# Altium PCB PCB1.PcbDoc
Units mil, origin at the board's own origin, x right, y up, seen from the top; angles counter-clockwise.
Board outline 1181.1 x 472.44 mil, 2 copper layers (Top Layer, Bottom Layer), stack 61.855 mil thick; 29 components, 33 nets, 137 pads, 59 vias.
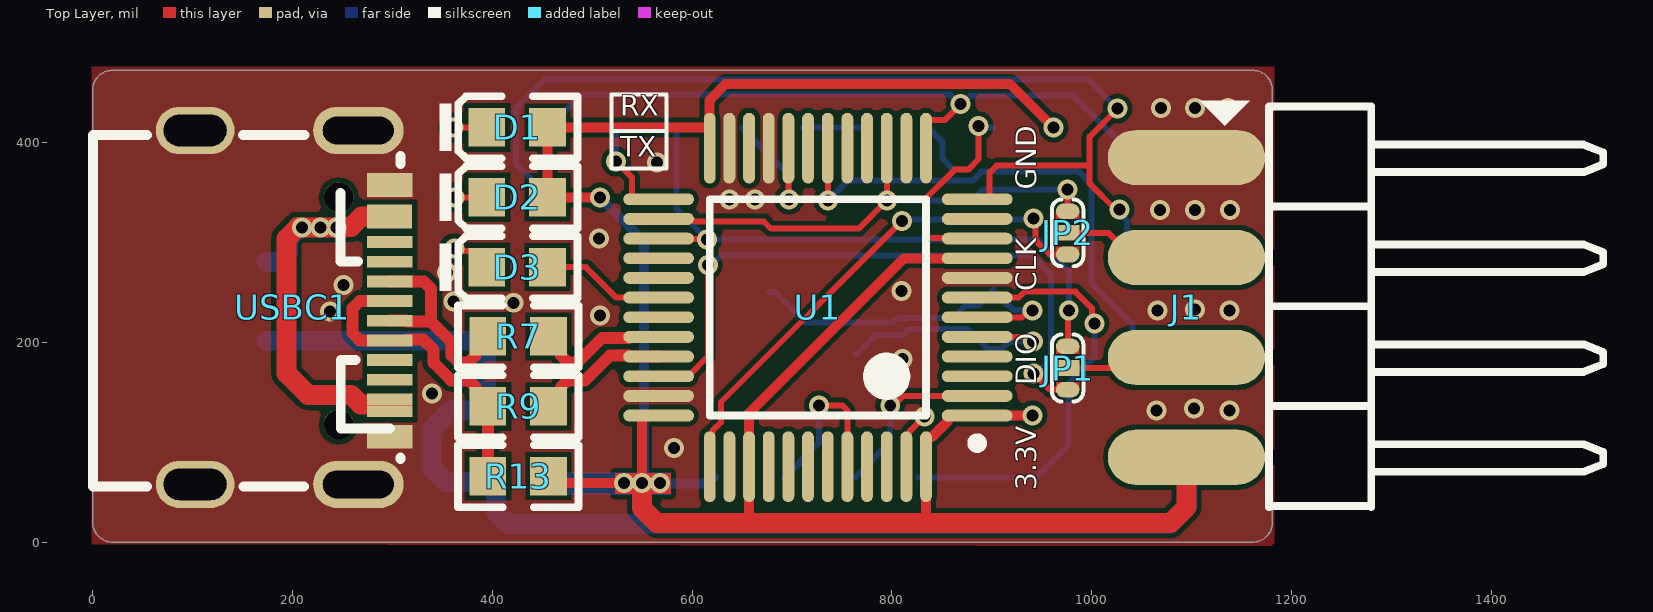
[diagram p0: Top Layer view]
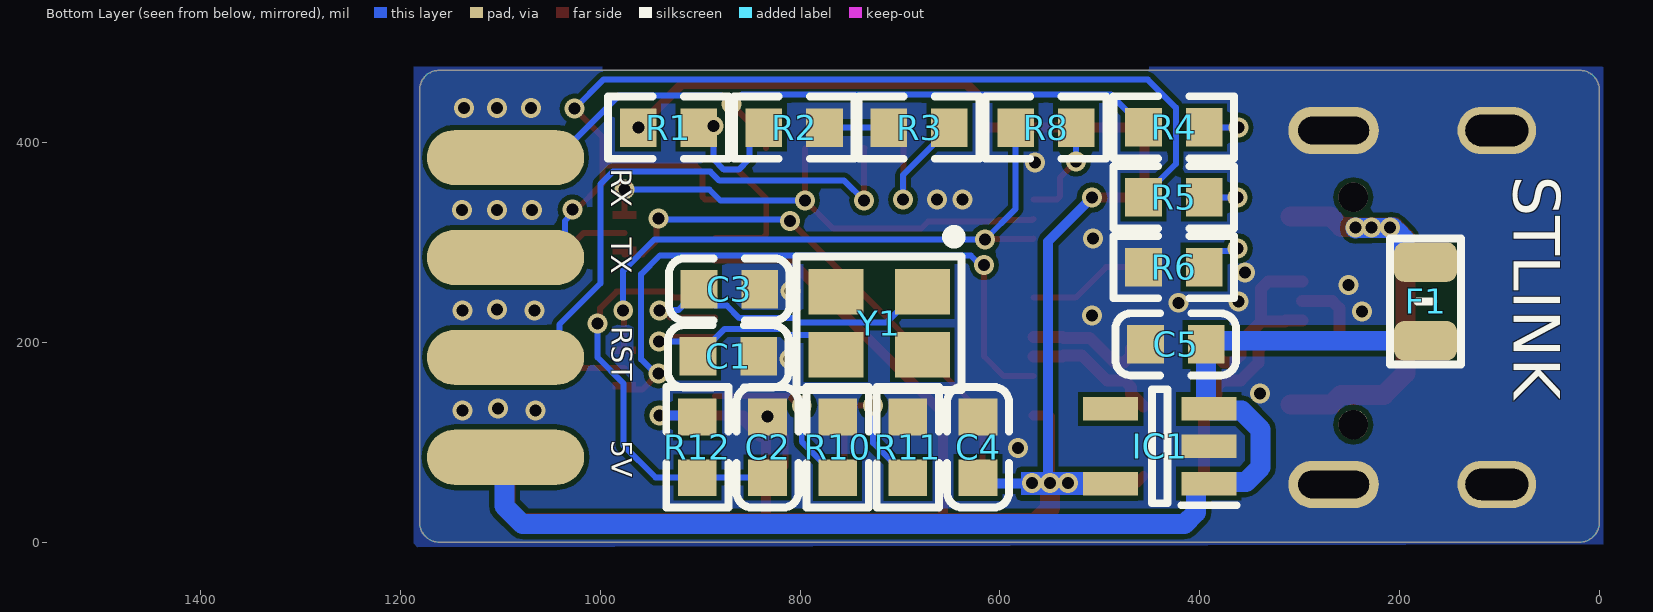
[diagram p1: Bottom Layer view, seen from below]

## Layer stack, top to bottom
Top Solder: solder mask 0.8, Solder Resist, Dk 3.8
Top Layer: signal copper 1.4
Dielectric 1: dielectric 59.055, FR-4, Dk 4.6
Bottom Layer: signal copper 1.4
Bottom Solder: solder mask 0.8, Solder Resist, Dk 3.8

## Board outline
0,19.68 0,452.76 cw(c19.68,452.76) 19.68,472.44 1161.42,472.44 cw(c1161.42,452.76) 1181.1,452.76 1181.1,19.69 cw(c1161.42,19.69) 1161.42,0 19.69,0 cw(c19.69,19.68)

## Design rules (kind name [scope] priority, off if disabled: settings)
Clearance [All] p1: gap=5 ignorepadtopadclearanceinfootprint=TRUE except(0: Arc-Hole Track-Hole SMDPad-Hole THPad-Hole Via-Hole Fill-Hole Poly-Hole Region-Hole Text-Hole)
DiffPairsRouting [All] p1: maxlimit=6 minlimit=6 mostfreqgap=6 toplayer_minwidth=12 toplayer_maxwidth=12 toplayer_prefwidth=12 bottomlayer_minwidth=12 bottomlayer_maxwidth=12 bottomlayer_prefwidth=12 maxuncoupledlength=500
HoleSize [All] p1: absolutevalues=TRUE maxlimit=248.03 minlimit=11.81 maxpercent=80.000 minpercent=20.000
MinimumSolderMaskSliver [All] p1: minsoldermaskwidth=3
PlaneClearance [All] p1: clearance=10
PlaneConnect [All] p1: planeconnectstyle=Direct reliefexpansion=20 reliefentries=4 reliefconductorwidth=10 reliefairgap=10
PolygonConnect [All] p1: connectstyle=Direct reliefconductorwidth=10 reliefentries=4 polygonreliefangle="90 Angle" airgapwidth=10
RoutingVias [All] p1: holewidth=12 width=20 viastyle="Through Hole" minholewidth=12 minwidth=20 maxholewidth=28 maxwidth=50
SilkToSilkClearance [All] p1: silktosilkclearance=0
SilkToSolderMaskClearance [IsPad] p1: minsilkscreentomaskgap=0 clearancetoexposedcopper=TRUE
SolderMaskExpansion [All] p1: expansion=1.5 istentingtop=FALSE
Width PWR [InNetClass('PWR')] p1: maxlimit=500 minlimit=10 preferedwidth=20 minimp=50.000000 maximp=50.000000 favimp=50.000000
Width [All] p2: maxlimit=50 minlimit=5 preferedwidth=6 minimp=50.000000 maximp=50.000000 favimp=50.000000
23 further rules are at their usual default settings.

## Classes and differential pairs
net class PWR: +3.3 +5 PWR
differential pair USB_1: +NetR7_2 -NetR9_2
differential pair USB_2: +USB_P -USB_N

## Components (designator, comment, footprint, x,y, rotation, side; value= is the part's Value field where it differs from the comment)
C1 "2.7pF" 0603_C 872,186 r0 bottom
C2 "0.1uF" 0603_C 832.75,95 r270 bottom
C3 "2.7pF" 0603_C 871,253 r0 bottom
C4 "1uF" 0603_C 622,95 r270 bottom
C5 "1uF" 0603_C 424,198 r180 bottom
D1 "" 0603_LED_S1 425,415.29 r0 top
D2 "" 0603_LED_S1 425,345.29 r0 top
D3 "" 0603_LED_S1 425,275.29 r0 top
F1 "1A" F0805 174,241 r270 bottom value=FUSE500mA
IC1 "ME6211C33M5G-N" SOT95P270X145-5N 440,96 r0 bottom
J1 "HDRSE_M_2X4" HDRSE_M_2X4 1095,235 r270 top locked value=HDRM_2X4
JP1 "JUMPER_SOLDER_3P" JP_3_60W 976,174.35 r90 top value=JMPHDR3PIN
JP2 "JUMPER_SOLDER_3P" JP_3_60W 976,309.65 r90 top value=JMPHDR3PIN
R1 "10KΩ" 0603_R 932,415 r180 bottom
R2 "10KΩ" 0603_R 806,415 r180 bottom
R3 "10KΩ" 0603_R 681,415 r0 bottom
R4 "680Ω" 0603_R 426,415.29 r180 bottom
R5 "680Ω" 0603_R 426,345.29 r180 bottom
R6 "2KΩ" 0603_R 426,275.29 r180 bottom
R7 "22Ω" 0603_R 426,206 r0 top
R8 "100Ω" 0603_R 554,415 r0 bottom
R9 "22Ω" 0603_R 426,136 r0 top
R10 "10KΩ" 0603_R 762.5,95 r270 bottom
R11 "10KΩ" 0603_R 692.25,95 r90 bottom
R12 "10KΩ" 0603_R 903,95 r90 bottom
R13 "1.5KΩ" 0603_R 426,66 r0 top
U1 "STM32F103CBT6" STM-LQFP48_N 726,235 r180 top
USBC1 "USB2.0 Type-C 16Pin母座" USB-C-SMD_TYPE-C-USB-5 200,235 r270 top locked
Y1 "8MHz" SMD-3225_4P 720.97,219.14 r0 bottom

## Footprints (in the part's own frame and the unit in brackets; to place one, negate y for a bottom-side part, rotate by r counter-clockwise, add the part's x,y. Pads: shape width x height; smd on the part's side, far side on the other; paste and mask are expansions set on the pad)
0603_C [mm]
  rect 0.93x0.98 smd: 1(-0.77,0) 2(0.77,0)
  silkscreen extent -1.53,-0.79 1.54,0.79, body extent -0.8,-0.4 0.8,0.4, height 0.3
0603_LED_S1 [mm]
  rect 0.93x0.98 smd: A(0.77,0) K(-0.77,0)
  silkscreen extent -1.98,-0.79 1.54,0.79, body extent -0.8,-0.4 0.8,0.4, height 0.6
0603_R [mm]
  rect 0.93x0.98 smd: 1(-0.77,0) 2(0.77,0)
  silkscreen extent -1.53,-0.79 1.54,0.79, body extent -0.85,-0.4 0.85,0.4, height 0.56
F0805 [mm] "FUSE FAST 500mA, 0805, 2012, 2.0X1.3mm"
  rrect50% 1x1.6 smd paste-0.1 mask+0.075: 1(-1,0) 2(1,0)
  Top Layer pour cut-out: -0.5,0.8 0.5,0.8 0.5,-0.8 -0.5,-0.8
  silkscreen extent -1.6,-0.9 1.6,0.9, body extent -1.1,-0.75 1.1,0.75, height 1.24
HDRSE_M_2X4 [mm] "Male Header 2X04 with 2.54 mm Pitch"
  oval 1.4x4 smd mask+0.1: 1(-3.81,0) 3(-1.27,0) 5(1.27,0) 7(3.81,0)
  oval 1.4x4 smd far side mask+0.1: 2(-3.81,0) 4(-1.27,0) 6(1.27,0) 8(3.81,0)
  silkscreen extent -5.25,0.34 5.08,10.6, body extent -5.01,-1 5.1,10.54, height 1.27
JP_3_60W [mm] "JUMPER SOLDER 0.6X1.6mm"
  oval 0.4x0.6 smd mask+0.05: 1(-0.55,0) 3(0.55,0)
  rect 0.4x0.6 smd mask+0.05: 2(0,0)
  Top Layer region: 0.55,0.294 0.35,0.294 0.35,-0.306 0.55,-0.306
  Top Layer region: -0.55,-0.306 -0.35,-0.306 -0.35,0.294 -0.55,0.294
  silkscreen extent -0.85,-0.4 0.85,0.4
SMD-3225_4P [mm]
  rect 1.4x1.15 smd: 1(-1.1,-0.8) 2(1.1,-0.8) 3(1.1,0.8) 4(-1.1,0.8)
  silkscreen extent -2.1,-2.35 2.1,1.7, body extent -1.6,-1.25 1.6,1.25, height 0.61
SOT95P270X145-5N [mm]
  rect 1.4x0.6 smd: 1(-1.25,0.95) 2(-1.25,0) 3(-1.25,-0.95) 4(1.25,-0.95) 5(1.25,0.95)
  silkscreen extent -1.95,-1.45 0.2,1.5, body extent -1.35,-1.45 1.35,1.45, height 1.45
STM-LQFP48_N [mm] "QFP, 48-Leads, Body 7x7mm, Pitch 0.5mm, IPC Medium Density"
  oval 1.8x0.3 smd: 1(-4.05,2.75) 2(-4.05,2.25) 3(-4.05,1.75) 4(-4.05,1.25) 5(-4.05,0.75) 6(-4.05,0.25) 7(-4.05,-0.25) 8(-4.05,-0.75) 9(-4.05,-1.25) 10(-4.05,-1.75) 11(-4.05,-2.25) 12(-4.05,-2.75) 25(4.05,-2.75) 26(4.05,-2.25) 27(4.05,-1.75) 28(4.05,-1.25) 29(4.05,-0.75) 30(4.05,-0.25) 31(4.05,0.25) 32(4.05,0.75) 33(4.05,1.25) 34(4.05,1.75) 35(4.05,2.25) 36(4.05,2.75)
  oval 0.3x1.8 smd: 13(-2.75,-4.05) 14(-2.25,-4.05) 15(-1.75,-4.05) 16(-1.25,-4.05) 17(-0.75,-4.05) 18(-0.25,-4.05) 19(0.25,-4.05) 20(0.75,-4.05) 21(1.25,-4.05) 22(1.75,-4.05) 23(2.25,-4.05) 24(2.75,-4.05) 37(2.75,4.05) 38(2.25,4.05) 39(1.75,4.05) 40(1.25,4.05) 41(0.75,4.05) 42(0.25,4.05) 43(-0.25,4.05) 44(-0.75,4.05) 45(-1.25,4.05) 46(-1.75,4.05) 47(-2.25,4.05) 48(-2.75,4.05)
  silkscreen extent -4.18,-2.75 2.75,3.57, body extent -3.5,-3.5 3.5,3.5, height 1.6
USB-C-SMD_TYPE-C-USB-5 [mm]
  oval 1.2x2.3 hole 0.7 slot 1.8 at 90 deg: 0(-4.5,1.675) 0(4.5,1.675)
  oval 1.2x2 hole 0.8 slot 1.6 at 90 deg: 0(-4.5,-2.475) 0(4.5,-2.475)
  rect 0.3x1.15 smd: A1(-3.263,2.473) A4(-2.462,2.471) A5(-1.162,2.475) A6(-0.162,2.475) A7(0.337,2.473) A9(2.638,2.475) A12(3.438,2.475) B1(3.138,2.475) B4(2.337,2.475) B5(1.838,2.475) B6(0.838,2.475) B7(-0.663,2.473) B9(-2.162,2.471) B12(-2.963,2.473)
  rect 0.3x1.148 smd: A8(-1.663,2.475) B8(1.337,2.475)
  round 0.75 hole 0.75 unplated: ""(-2.803,1.175) ""(2.978,1.175)
  silkscreen extent -4.38,-5.08 4.56,2.75, body extent -4.34,-5.14 4.6,2.76, height 3.25

## Part data
C1 C3: library part CMP-002-000144-1, "贴片电容", Package=0603, SuppliersPartNumber=C16149, ComponentLink1Description=供应商链接, ComponentLink1URL=http://www.szlcsc.com/product/details_16831.html, Design Item ID="0603 2.7pF (2R7) 0.25pF 50V", Source=Cap.SchLib
C2 C4 C5: library part CMP-002-000018-1, "贴片电容", Package=0603, SuppliersPartNumber=C15849, ComponentLink1Description=供应商链接, ComponentLink1URL=http://www.szlcsc.com/product/details_16531.html, Design Item ID="0603 1uF (105) 10% 50V", Source=Cap.SchLib
D1 D2 D3: library part CMP-012-000003-2, "发光二极管", Package=0603, SuppliersPartNumber=C72041, ComponentLink1Description=供应商链接, ComponentLink1URL=http://www.szlcsc.com/product/details_73150.html, Design Item ID="0603 蓝灯", Source=LED.SchLib
F1: library part CMP-001-000024-1, Design Item ID=FUSE_500mA_0805_FAST, MANF=MANF, MANF_P#=MANF_PART#, PARAM="500mA; 32VDC; fast acting", PARAM2="0.25 Ohm DC Cold Resistance", Source=protect_tvs_esd_fuse.SchLib
IC1: library part CMP-001-0849-1, "Integrated Circuit", Manufacturer_Name=Microne, Datasheet Link=https://datasheet.lcsc.com/szlcsc/1811131510_MICRONE-Nanjing-Micro-One-Elec-ME6211C33M5G-N_C82942.pdf, Design Item ID=ME6211C33M5G-N, Height=1.45mm, Manufacturer_Part_Number=ME6211C33M5G-N, Source=SamacSys.SchLib
J1: library part CMP-002-00326-1, "CONN, HEADER, Male, pitch: 2.54mm, 8POS", Design Item ID=HDRSE_M_2X4, MANF=MANF, MANF_P#=MANF_PART#, Source=conn_header_2.54_st_smd_edge.SchLib
JP1 JP2: library part CMP-001-0854-1, "JUMPER, HEADER 3PIN", Design Item ID=JUMPER_SOLDER_3P, MANF=MANF, MANF_P#=MANF_P#, Source=test-tp_jumper.SchLib
R1 R2 R3 R4 R5 R6 R7 R8 R9 R10 R11 R12 R13: library part CMP-004-000401-1, "贴片电阻", Package=0603, SuppliersPartNumber=C25804, ComponentLink1Description=供应商链接, ComponentLink1URL=http://www.szlcsc.com/product/details_26547.html, Design Item ID="0603 10KΩ (1002) 1%", Source=RES.SchLib
U1: library part CMP-001-0295-1, "ARM Cortex-M3 32-bit MCU, 128 KB Flash, 20 KB Internal RAM, 37 I/Os, 48-pin LQFP, -40 to 85 degC, Tray", I/Os (High Current)=37, Operating Frequency(F) (Processor speed) (MHz)=72Hz, Supply Voltage(Vcc) min (V)=2, A/D Converter="2x12-bit (10 Channel)", Component Type=Standard, ComponentLink1Description="Manufacturer URL", ComponentLink1URL=http://www.st.com/web/en/home.html, ComponentLink2Description=Datasheet, ComponentLink2URL=http://www.st.com/st-web-ui/static/active/en/resource/technical/document/datasheet/CD00161566.pdf, ComponentLink3Description="Package Specification", ComponentLink3URL=http://www.st.com/st-web-ui/static/active/en/resource/technical/document/datasheet/DM00058181.pdf, Core="ARM Cortex-M3", DatasheetVersion="Rev. 16", Design Item ID=STM32F103CBT6, FLASH Size (Prog) (kB)=128, Internal RAM Size (kB)=20, Mounting Technology="Surface Mount", PackageDescription="48-Pin Low Profile Quad Flat Package, 7 x 7 mm Body, 0.5 mm Pitch", PackageReference=LQFP48, PackageVersion="Rev. 6, 06/2013", Packing=Tray, PartNumber=STM32F103CBT6, Pin Count=48, Source="STMicroelectronics STM32 F1.SchLib"
USBC1: library part CMP-00155-3, "USB2.0 Type-C 母座 16Pin", Author=白一清, Part Number="USB2.0 Type-C 16Pin母座"
Y1: library part CMP-016-000002-1, "贴片晶振", Package=SMD-3225_4P, SuppliersPartNumber=C9002, ComponentLink1Description=供应商链接, ComponentLink1URL=http://www.szlcsc.com/product/details_9522.html, Design Item ID="SMD-3225_4P  12MHZ 20PF 10PPM", Source=CrystalOscillator.SchLib

## Via types
v1: diameter 20, hole 12, Top Layer to Bottom Layer, tented both sides, 59 vias

## Nets (pads, with @x,y where several pads share a name; then routed paths per layer and width w, separated by ;. In a path a pad name is that pad's centre, name@x,y a point inside that pad or via, vN(x,y) a via of type N, cw(c..) or ccw(c..) an arc to the next point about the centre after c; other vN are vias at no path point)
+3.3: C4.2 D1.A D2.A IC1.5 J1.7 R1.1 R12.2 R13.2 U1.1 U1.9 U1.24 U1.36 U1.39 U1.48 | length 2566.6
  Top Layer w10: R13.2 463.32,59 v1(532,59) ; v1(508,345) 455.6,345 D2.A D1.A 616.9,415.29 U1.24@616.9,423.63 ; v1(550,59) 550,125.9 550.84,126.73 U1.36 ; U1.24@617.27,424.01 617.39,424.12 617.39,425.6 617.27,425.72 617.27,442.27 633.57,458.57 918.43,458.57 v1(962,415) ; 655,19 657.1,21.1 U1.39 657.1,129.1 812.21,284.21 U1.9 ; 832,19 834.27,21.27 U1.48 834.27,104.59 835.1,105.43 840.49,105.43 855.57,120.51 855.57,125.9 856.41,126.73 U1.1 885.58,126.87 940.87,126.87 v1(941,127) ; 932,19 935,22 ; 979.32,21.68 982,19
  Top Layer w20: v1(550,59) 550,34 565,19 655,19 832,19 932,19 982,19 1079,19 1095,35 J1.7
  Bottom Layer w10: IC1.5 489.41,58.8 531.8,58.8 v1(532,59) ; v1(508,345) 552,301 552,65 558,59 v1(568,59) 568.5,58.5 615.81,58.5 C4.2 ; v1@550,56 v1@568,56 ; R12.2 904.68,127 v1(941,127) ; v1(962,415) R1.1
+5: C5.2 F1.2 IC1.1 IC1.3 J1.8 | length 1237.4
  Bottom Layer w20: F1.2 384.92,201.63 cw(c384.92,189.24) C5.2 393.68,140.4 cw(c383.79,140.4) IC1.3 388.98,131.59 357.97,131.59 339,112.62 339,75 353.59,60.41 388.98,60.41 IC1.1 401.89,58.6 403.7,56.79 403.7,29.72 415.42,18 1078,18 1096,36 1096,84 J1.8
GND: C1.1 C2.1 C3.1 C4.1 C5.1 IC1.2 J1.1 R2.2 R3.2 R6.1 R10.1 R11.2 U1.8 U1.21 U1.23 U1.35 U1.47 USBC1.0 USBC1.A1 USBC1.A12 USBC1.B1 USBC1.B12 | length 122.3
  Top Layer w6: U1.47 814.58,106.65 817.49,109.56 817.49,110.71 v1(832.7,125.93)
  Bottom Layer w6: R3.2 R2.2
  other v1: 581.9,94.07 1065,132 1138,132 1102.51,133.7 339.86,148.83 810.84,183.55 507.69,226.94 237.49,230.88 1066,232 1103.51,232.7 1138,232 421.27,239.67 361.34,240.94 809.84,251.55 251.32,257.51 354.57,270.13 507,304 1068.51,332.7 1103.51,332.7 1138.51,332.7 637.66,342.96 663,343 565,380 1069.51,434.7 1103.51,434.7 1136.51,434.7
JTCK: JP2.3 U1.15 U1.26 | length 504.8
  Top Layer w6: U1.26 567.66,322.47 600.95,322.47 602.5,320.93 607.47,320.93 607.54,321 671.87,321 679.02,313.84 766.84,313.84 v1(795,342) U1.15@795,394.35 ; JP2.3@976,330.31 v1(976,353)
  Bottom Layer w6: v1(795,342) 880,342 891,353 v1(976,353)
JTDI: U1.17
JTDO: U1.16
JTMS: JP1.3 R8.2 U1.27 | length 624.9
  Top Layer w6: U1.27 567,303.45 614.55,303.45 v1(615,303) ; JP1.3 976.59,196.59 976.59,231.41 v1(977.17,232)
  Bottom Layer w6: R8.2 584.32,333.68 v1(615,303) 946,303 977.17,271.83 v1(977.17,232)
LED_RUN: D3.A U1.30 | length 123.8
  Top Layer w6: D3.A 493.71,275.29 524.16,244.84 U1.30
NetC1_2: C1.2 U1.5 Y1.3 | length 256.5
  Top Layer w6: U1.5 932.63,205.47 937.39,200.72 v1(941.17,200.72)
  Bottom Layer w6: Y1.3 783.91,207.28 810.56,207.28 816.57,213.29 876.01,213.29 895.94,193.36 909.67,193.36 917.03,200.72 v1(941.17,200.72)
NetC2_2: C2.2 R12.1 U1.7 | length 437
  Top Layer w6: U1.7 926.84,244.84 932.82,250.82 983.81,250.82 1000.32,234.31 1000.32,221.68 v1(1003,219)
  Bottom Layer w6: C2.2@826.75,64.69 C2.2 897,64.69 R12.1 944.68,64.68 977,97 977,159 1003,185 v1(1003,219)
NetC3_2: C3.2 U1.6 Y1.1 | length 357
  Top Layer w6: U1.6 930.37,225.16 937.21,232 v1(941,232)
  Bottom Layer w6: Y1.1 682.58,250.64 713.22,220 801.35,220 805.64,224.29 860.89,224.29 873.31,236.71 886.01,236.71 C3.2@901.32,252.02 ; C3.2 C3.2@901.32,252.02 ; v1(941,232) 940.68,232.32 922,232.32 917.61,236.71 916.62,236.71 C3.2@901.32,252.02
NetD1_K: D1.K R4.2 | length 68.6
  Top Layer w6: v1(361,415) 394.4,415 D1.K
  Bottom Layer w6: v1(361,415) 395.4,415 R4.2
NetD2_K: D2.K R5.2 | length 66.6
  Top Layer w6: v1(362,345) 394.4,345 D2.K
  Bottom Layer w6: v1(362,345) 395.4,345 R5.2
NetD3_K: D3.K R6.2 | length 83
  Top Layer w6: v1(362,294) 364.42,291.58 379.38,291.58 394.69,276.27 D3.K
  Bottom Layer w6: v1(362,294) 364.42,291.58 380.38,291.58 395.68,276.27 R6.2
NetJ1_3: J1.3 JP2.2 | length 129.2
  Top Layer w6: JP2.2 1016.77,309.65 1041.42,285 J1.3
NetJ1_5: J1.5 JP1.2 | length 123.4
  Top Layer w6: JP1.2 1019.87,174.35 1030.53,185 J1.5
NetR1_2: R1.2 R2.1 U1.10 | length 323.7
  Top Layer w6: U1.10 884.9,304.45 837.51,304.45 834,307.96 834,344 863,373 876.46,373 887,383.54 v1(887,416.39)
  Bottom Layer w6: R2.1 851,400.32 851,383.54 861.54,373 876.46,373 887,383.54 R1.2@887,409 ; v1(887,416.39) R1.2@887,409 ; R1.2 893,415 R1.2@887,409
NetR3_1: R3.1 U1.20 | length 142.9
  Top Layer w6: U1.20 696.74,394.18 696.74,343.26 v1(697,343)
  Bottom Layer w6: R3.1 650.69,414.02 697,367.7 v1(697,343)
NetR7_2: R7.2 U1.32 | length 134.7
  Top Layer w12: R7.2@456.84,205.47 468.62,193.69 468.62,187.03 475.65,180 485.59,180 492.62,187.03 510.2,204.63 536.37,204.63 537.21,205.47 U1.32
NetR8_1: R8.1 U1.25 | length 103.5
  Top Layer w6: v1(524,381) 540.02,364.98 540.02,345.95 542.71,343.27 U1.25
  Bottom Layer w6: R8.1 524,414.69 v1(524,381)
NetR9_2: R9.2 U1.33 | length 135.5
  Top Layer w12: R9.2 468.62,148.31 468.62,154.97 475.65,162 493.05,162 510.62,179.57 517.65,186.63 536.37,186.63 537.21,185.79 U1.33
NetR10_2: R10.2 U1.2 | length 178.7
  Top Layer w6: v1(798.46,136.98) 802.25,136.98 811.68,146.42 U1.2
  Bottom Layer w6: R10.2 763.48,64.68 778.79,79.99 778.79,80.98 798.46,100.64 v1(798.46,136.98)
NetR11_1: R11.1 U1.44 | length 174.3
  Top Layer w6: v1(727,137) 750.49,137 755.53,131.96 U1.44
  Bottom Layer w6: R11.1 693.23,64.68 708.54,79.99 708.54,80.98 727,99.44 v1(727,137)
nRST: J1.6 U1.18 | length 564.9
  Top Layer w6: U1.18 735.92,394.37 735.92,342.08 v1(736,342)
  Bottom Layer w6: v1(736,342) 756,362 881.01,362 890.01,371 987.49,371 1000,358.49 1000,259 1040.96,218.04 1040.96,207.69 1063.65,185 J1.6
PWR: F1.1 USBC1.A4 USBC1.A9 USBC1.B4 USBC1.B9 | length 476.8
  Top Layer w20: v1@205.64,315.5 194,303.86 194,169 215.46,147.54 258.59,147.54 268.13,138 USBC1.B4@309,138 ; v1(209.57,315) 226,315 226.5,315.5 227,315 v1(244,315) ; v1@244,315.5 258.52,315.5 269.02,326 USBC1.B9@309,326
  Bottom Layer w20: F1.1 185.81,280.37 195.5,290.06 195.5,303.86 201.84,310.2 206.21,314.57 207.21,315 v1(209.57,315) ; v1@209.57,314.57 228,314.57 242.62,314.57 v1(244,315) v1@244,314
  other v1: 228,315
RENUMn: U1.38
RX: J1.2 R4.1 U1.13 | length 752.8
  Top Layer w6: U1.13 834.27,419.84 836.95,422.53 852.96,422.53 v1(869,438.57)
  Bottom Layer w6: R4.1 456.31,416.27 471.62,431.58 472.61,431.58 489.03,448 858.49,448 867.92,438.57 v1(869,438.57) ; v1@869,441 872.79,441 878.79,447 981.82,447 1043.82,385 J1.2
ST_SWCLK: JP2.1 U1.37 | length 524.3
  Top Layer w6: U1.37 617.73,106.65 620.45,109.36 620.45,111.45 629,120 629,140.27 v1(810.46,321.73) ; v1(942,324) 943.76,322.24 943.76,302.24 958,288 JP2.1 JP2.1@974.19,289.81 ; JP2.1@972.32,292.87 JP2.1@974.19,291
  Bottom Layer w6: v1(810.46,321.73) 811.59,322.86 940.86,322.86 v1(942,324)
ST_SWDIO: JP1.1 U1.34 | length 653.2
  Top Layer w6: U1.34 596.08,166.1 615.83,185.85 v1(615.83,277.37) ; v1(942,169) 958.31,152.69 JP1.1
  Bottom Layer w6: v1(615.83,277.37) 619.62,277.37 629.25,287 940.56,287 959.17,268.38 959.17,182.94 945.24,169 v1(942,169)
T_SWO: U1.31
TX: J1.4 R5.1 U1.12 | length 1093.9
  Top Layer w6: U1.12 895.32,343.27 898,345.95 898,370 905,377 998,377 ; v1(1026,434) 998,406 998,377 ; v1(1028,333) 1024,333 998,359 998,377
  Bottom Layer w6: R5.1 456.31,346.27 424,378.59 424,435 452,463 997,463 v1(1026,434) ; v1(1028,333) 1028,329.21 1035.65,321.56 1035.65,307.69 1058.34,285 J1.4
USB_N: R7.1 USBC1.A7 USBC1.B7 | length 215.1
  Top Layer w12: USBC1.A7 313.92,221.72 314.75,220.88 338.53,220.88 ; USBC1.B7 297.47,260.99 331.5,260.99 338.53,253.96 338.53,220.88 ; R7.1 383.38,193.69 383.38,187.03 376.35,180 366.41,180 359.38,187.03 359.38,200.04 338.53,220.88
USB_P: R9.1 R13.1 USBC1.A6 USBC1.B6 | length 313.1
  Top Layer w12: USBC1.A6 297.35,241.3 267.33,241.3 260.3,234.27 260.3,209.15 267.33,202.12 297.35,202.12 USBC1.B6 313.98,202.03 314.84,202.88 331.08,202.88 341.38,192.58 341.38,179.57 358.95,162 376.35,162 383.38,154.97 383.38,148.31 R9.1 R13.1
pads on no net: IC1.4 U1.3 U1.4 U1.11 U1.14 U1.19 U1.22 U1.28 U1.29 U1.40 U1.41 U1.42 U1.43 U1.45 U1.46 USBC1. USBC1.A5 USBC1.A8 USBC1.B5 USBC1.B8 Y1.2 Y1.4

## Polygon pours and split planes (outlines as drawn)
GND on Bottom Layer "GND_L02_P001" (solid, remove dead copper, pour order 1): -4,-2 -4,477 -3,476 1187,476 1187,-2 1184,-5
GND on Top Layer "GND_L01_P000" (solid, remove dead copper, pour order 0): -3,-2 -1,0 -1,476 1184,476 1183,475 1183,-4

## Other copper
Top Layer:
  rectangle net +3.3: 523,48 579,69
  rectangle net PWR: 201,306 252,325
Bottom Layer:
  rectangle net +3.3: 462,47 579,70

## Silkscreen, mask and mechanical layers (free items; w line width, h text height)
Top Overlay:
  lines w4: 520.5,411.5 574,411.5 ; 519.5,374 519.5,448 574.5,448 574.5,374 519.5,374
  text "RX" at 528.3,419.64 h35
  text "TX" at 528.3,378.64 h35
  text "GND" at 951.61,353 h35 r90
  text "CLK" at 951.61,251.37 h35 r90
  text "DIO" at 951.61,157.19 h35 r90
  text "3.3V" at 951.61,52 h35 r90
Bottom Overlay:
  text "RX" at 996,374 h35 r90
  text "STLINK" at 101.04,366.91 h80 r90
  text "TX" at 996,305 h35 r90
  text "RST" at 995.61,216 h35 r90
  text "5V" at 995.61,102 h35 r90
Mechanical 1:
  the board outline again, w4
Drill Drawing:
  circle w10: c182.62,1338.28 r33.33
  lines w10: 149.29,1004.94 215.96,1004.94 215.96,1071.61 149.29,1071.61 149.29,1004.94 ; 149.29,1221.61 215.96,1221.61 182.62,1154.94 149.29,1221.61 ; 149.29,1471.61 165.96,1471.61 182.62,1454.94 199.29,1471.61 215.96,1471.61 199.29,1488.28 215.96,1504.94 199.29,1504.94 182.62,1521.61 165.96,1504.94 149.29,1504.94 165.96,1488.28 149.29,1471.61
  lines w15: 89.5,959.94 13017.88,959.94 ; 89.5,1559.94 13017.88,1559.94 ; 640.38,809.94 640.38,1709.94 ; 1180.24,809.94 1180.24,1709.94 ; 2279.92,809.94 2279.92,1709.94 ; 2785.79,809.94 2785.79,1709.94 ; 3519.59,809.94 3519.59,1709.94 ; 5019.14,809.94 5019.14,1709.94 ; 5608.99,809.94 5608.99,1709.94 ; 6354.79,809.94 6354.79,1709.94 ; 7004.62,809.94 7004.62,1709.94 ; 7858.38,809.94 7858.38,1709.94 ; 9191.99,809.94 9191.99,1709.94 ; 10525.6,809.94 10525.6,1709.94 ; 11615.28,809.94 11615.28,1709.94 ; 89.5,809.94 13017.88,809.94 13017.88,1709.94 89.5,1709.94 89.5,809.94
  text "Symbol" at 179.5,1604.94 h72
  text "Count" at 685.38,1604.94 h72
  text "Hole Size" at 1225.24,1604.94 h72
  text "Plated" at 2324.92,1604.94 h72
  text "Hole Type" at 2830.79,1604.94 h72
  text "Drill Layer Pair" at 3564.59,1604.94 h72
  text "Via/Pad" at 5064.14,1604.94 h72
  text "Pad Shape" at 5653.99,1604.94 h72
  text "Template" at 6399.79,1604.94 h72
  text "Description" at 7049.62,1604.94 h72
  text "Hole Tolerance (+)" at 7903.38,1604.94 h72
  text "Hole Tolerance (-)" at 9236.99,1604.94 h72
  text "Hole Length" at 10570.6,1604.94 h72
  text "Routed Path Length" at 11660.28,1604.94 h72
  text "2" at 685.38,1454.94 h60
  text "27.56mil (0.700mm)" at 1225.24,1454.94 h60
  text "PTH" at 2324.92,1454.94 h60
  text "Slot" at 2830.79,1454.94 h60
  text "Top Layer - Bottom Layer" at 3564.59,1454.94 h60
  text "Pad" at 5064.14,1454.94 h60
  text "Rounded" at 5653.99,1454.94 h60
  text "(Mixed)" at 6399.79,1454.94 h60
  text "70.87mil (1.800mm)" at 10570.6,1454.94 h60
  text "43.31mil (1.100mm)" at 11660.28,1454.94 h60
  text "2" at 685.38,1304.94 h60
  text "29.53mil (0.750mm)" at 1225.24,1304.94 h60
  text "NPTH" at 2324.92,1304.94 h60
  text "Round" at 2830.79,1304.94 h60
  text "Top Layer - Bottom Layer" at 3564.59,1304.94 h60
  text "Pad" at 5064.14,1304.94 h60
  text "Rounded" at 5653.99,1304.94 h60
  text "c75hn75" at 6399.79,1304.94 h60
  text "-" at 10570.6,1304.94 h60
  text "-" at 11660.28,1304.94 h60
  text "2" at 685.38,1154.94 h60
  text "31.50mil (0.800mm)" at 1225.24,1154.94 h60
  text "PTH" at 2324.92,1154.94 h60
  text "Slot" at 2830.79,1154.94 h60
  text "Top Layer - Bottom Layer" at 3564.59,1154.94 h60
  text "Pad" at 5064.14,1154.94 h60
  text "Rounded" at 5653.99,1154.94 h60
  text "(Mixed)" at 6399.79,1154.94 h60
  text "62.99mil (1.600mm)" at 10570.6,1154.94 h60
  text "31.50mil (0.800mm)" at 11660.28,1154.94 h60
  text "59" at 685.38,1004.94 h60
  text "12.00mil (0.305mm)" at 1225.24,1004.94 h60
  text "PTH" at 2324.92,1004.94 h60
  text "Round" at 2830.79,1004.94 h60
  text "Top Layer - Bottom Layer" at 3564.59,1004.94 h60
  text "Via" at 5064.14,1004.94 h60
  text "Rounded" at 5653.99,1004.94 h60
  text "(Mixed)" at 6399.79,1004.94 h60
  text "-" at 10570.6,1004.94 h60
  text "-" at 11660.28,1004.94 h60
  text "65 Total" at 685.38,854.94 h60
  text "Slot definitions :" at 179.5,709.97 h60
  text "Routed Path Length" at 1212.19,709.97 h60
  text "= Calculated from tool start centre position to tool end centre position." at 2314.86,709.97 h60
  text "Hole Length" at 1212.19,609.99 h60
  text "= Routed Path Length + Tool Size = Slot length as defined in the PCB layout" at 1904.99,609.99 h60